# Altium PCB EBC2.PcbDoc
Units mil, origin at the board's own origin, x right, y up, seen from the top; angles counter-clockwise.
Board outline 2303.15 x 1181.1 mil, 2 copper layers (Top Layer, Bottom Layer), stack 12.8 mil thick; 135 components, 122 nets, 382 pads, 17 vias.
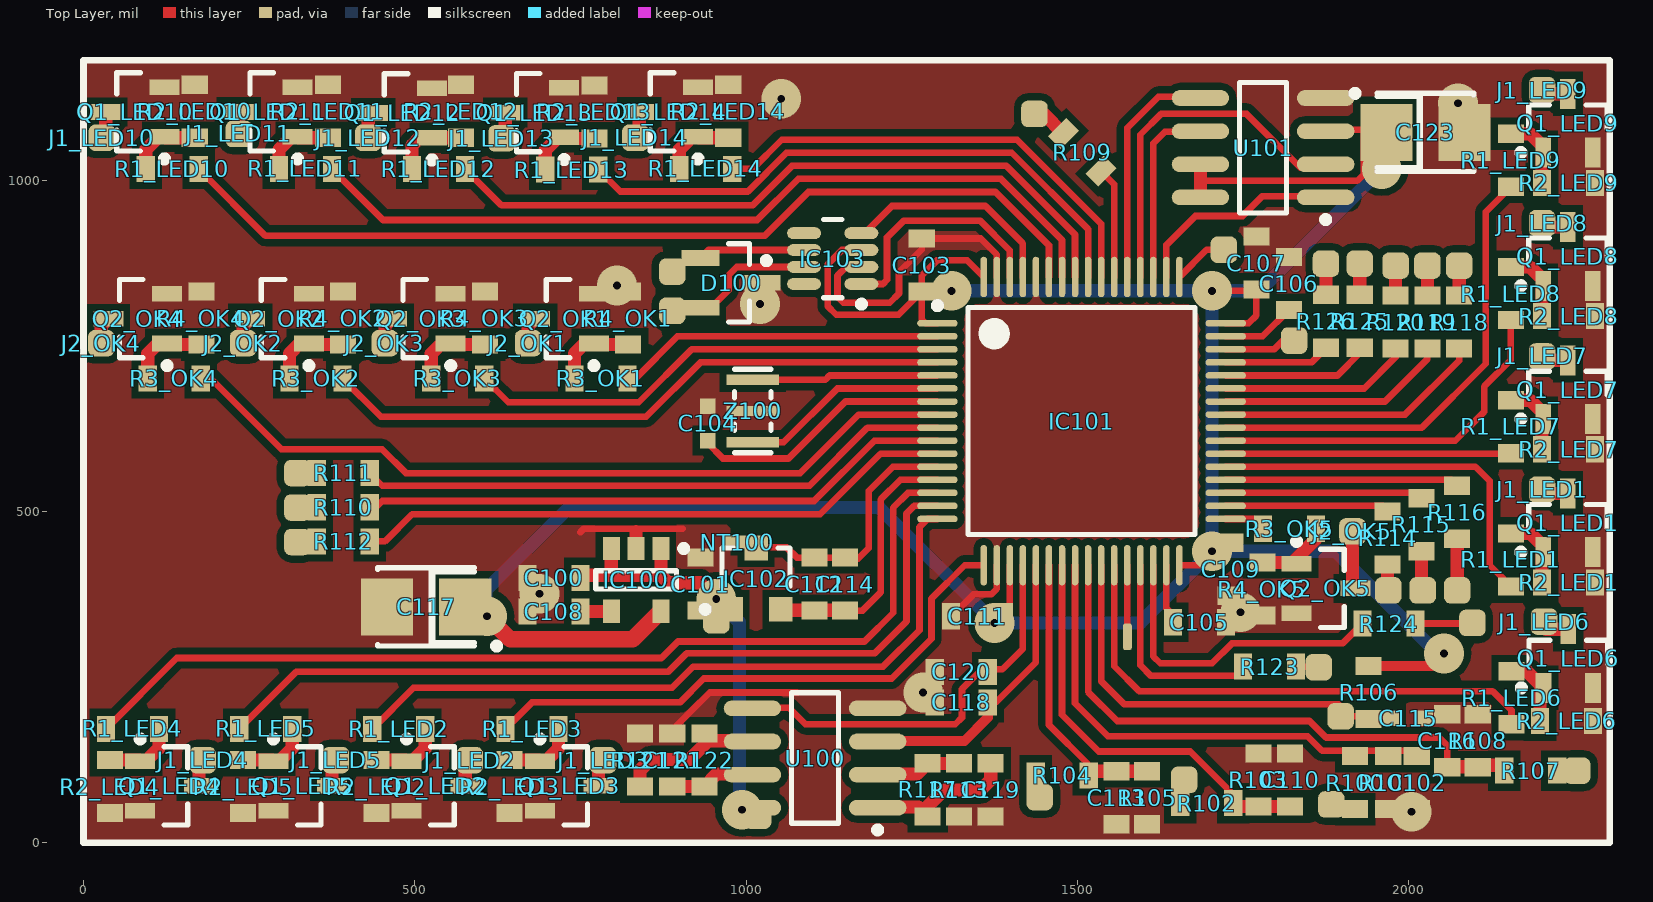
[diagram p0: Top Layer view]
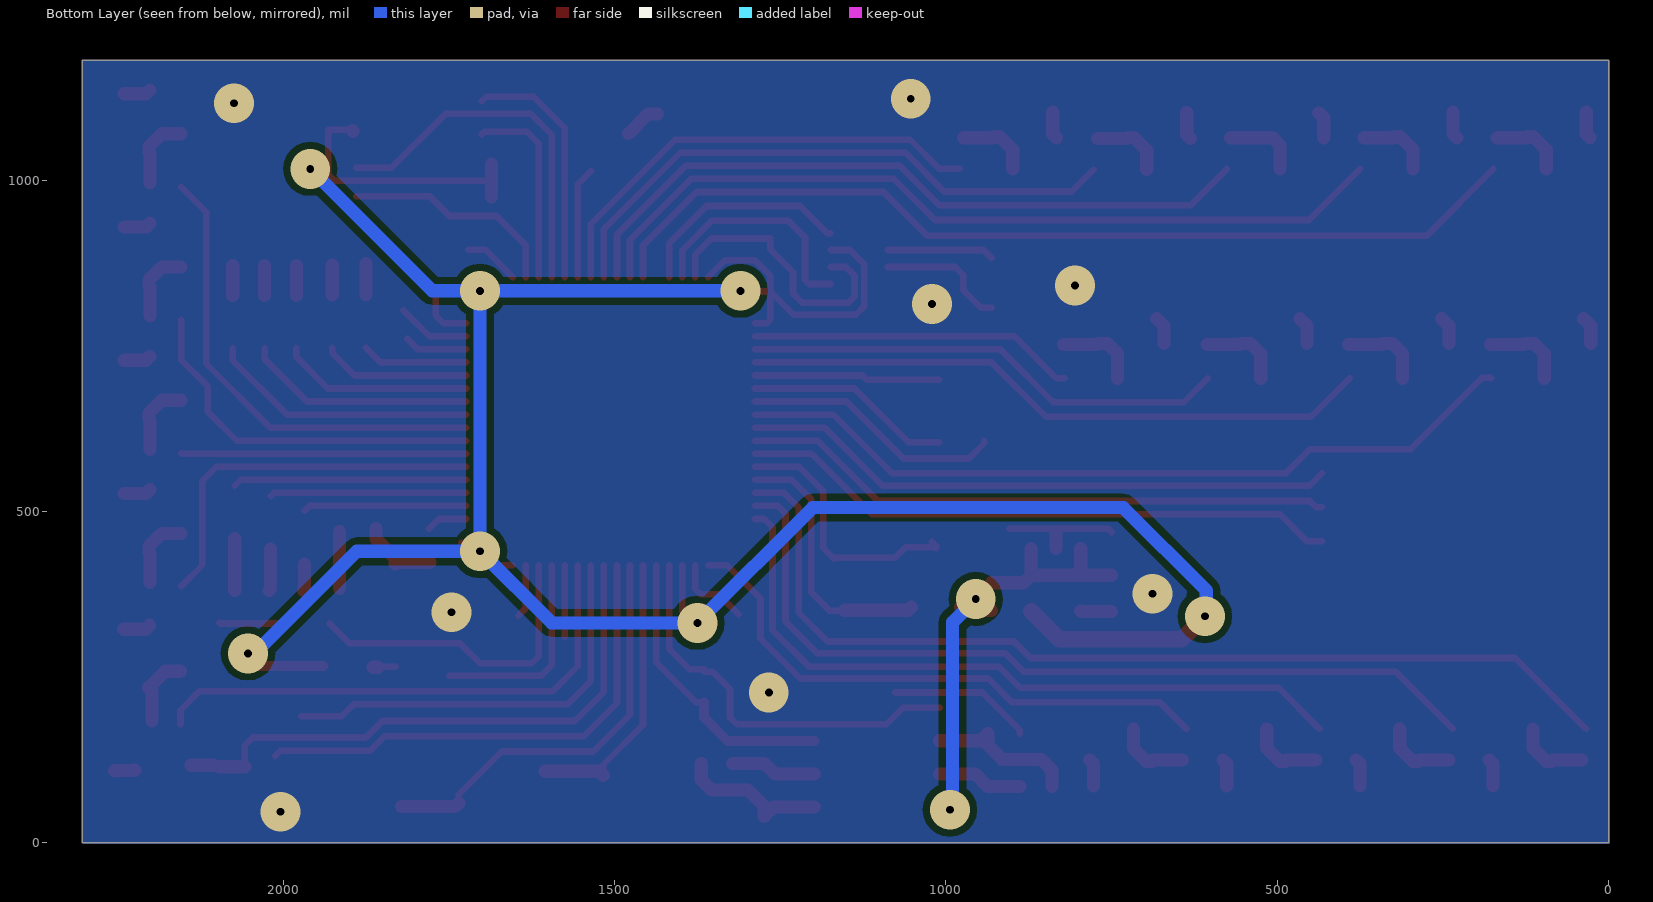
[diagram p1: Bottom Layer view, seen from below]

## Layer stack, top to bottom
Top Solder: solder mask 0.4, Solder Resist, Dk 3.5
Top Layer: signal copper 1.4
Dielectric1: core 10, FR-4, Dk 4.2
Bottom Layer: signal copper 1.4
Bottom Solder: solder mask 0.4, Solder Resist, Dk 3.5

## Board outline
0,0 0,1181.1 2303.15,1181.1 2303.15,0

## Design rules (kind name [scope] priority, off if disabled: settings)
AssemblyTestPointUsage [All] p1 off:
AssemblyTestpoint [All] p1 off: testpointundercomponent=TRUE minsize=40 maxsize=100 preferedsize=60 minholesize=0 maxholesize=40 preferedholesize=32 testpointgrid=1 usegrid=TRUE gridtolerance=0.01 allowsidetop=TRUE allowsidebottom=TRUE
Clearance Clearance_Phases [InPolygon and InNetClass('Phases')] p1: gap=5 ignorepadtopadclearanceinfootprint=FALSE except(0: Arc-Hole Track-Hole SMDPad-Hole THPad-Hole Via-Hole Fill-Hole Poly-Hole Region-Hole Text-Hole; 7: Arc-Poly Track-Poly SMDPad-Poly THPad-Poly Via-Poly Fill-Poly Poly-Poly)
Clearance "Clearance pads mounting" [(InNet('HOUSING_0') OR InNet('HOUSING_1') OR InNet('HOUSING_2')) AND IsPad] p2: gap=0.1 ignorepadtopadclearanceinfootprint=FALSE except(0: Arc-Hole Track-Hole SMDPad-Hole THPad-Hole Via-Hole Fill-Hole Poly-Hole Region-Hole Text-Hole)
Clearance "Clearance main" [All] p3: gap=10.5 ignorepadtopadclearanceinfootprint=FALSE except(0: Arc-Hole Track-Hole SMDPad-Hole THPad-Hole Via-Hole Fill-Hole Poly-Hole Region-Hole Text-Hole; 6.5: SMDPad-SMDPad; 7: Arc-SMDPad Arc-Via Arc-Text Track-SMDPad Track-Via Track-Text SMDPad-Text THPad-Text Via-Text Fill-Text Poly-Text Region-Text Text-Text; 8: Arc-Arc Arc-Track Arc-THPad Track-Track Track-THPad SMDPad-THPad THPad-THPad; 8.5: SMDPad-Via THPad-Via Via-Via)
ComponentClearance [All] p1 off: gap=10 collisioncheckmode=3 verticalgap=10 showdistances=FALSE
DiffPairsRouting [All] p1: maxlimit=10 minlimit=5 mostfreqgap=5 toplayer_minwidth=6 toplayer_maxwidth=25 toplayer_prefwidth=8 bottomlayer_minwidth=6 bottomlayer_maxwidth=25 bottomlayer_prefwidth=8 maxuncoupledlength=500
FabricationTestPointUsage [All] p1 off: valid=0 allowmultiple=FALSE
FabricationTestpoint [(IsPad And (OnTopLayer Or OnBottomLayer))] p1 off: side=3 testpointundercomponent=TRUE minsize=40 maxsize=100 preferedsize=60 minholesize=0 maxholesize=40 preferedholesize=32 testpointgrid=1 allowsidetop=TRUE allowsidebottom=TRUE usegrid=TRUE gridtolerance=0.01
HoleSize [All] p1: absolutevalues=TRUE maxlimit=200 minlimit=1 maxpercent=80.000 minpercent=20.000
HoleToHoleClearance [All] p1: gap=5.12 allowstackedmicrovias=TRUE
MinimumSolderMaskSliver [All] p1 off: minsoldermaskwidth=1.97
NetAntennae [All] p1 off: netantennaetolerance=10
PasteMaskExpansion [All] p1 off: expansion=0
PlaneClearance [All] p1: clearance=10
PlaneConnect [All] p1: planeconnectstyle=Direct reliefexpansion=7.87 reliefentries=4 reliefconductorwidth=0 reliefairgap=7.87
PolygonConnect [All] p1: connectstyle=Direct reliefconductorwidth=11.81 reliefentries=4 polygonreliefangle="90 Angle" airgapwidth=11.81
RoomDefinition LED6 [InComponentClass('LED6')] p1: confinementstyle=ConfineIn formatcopy=TRUE lockcomponents=FALSE outline 2311.84,157 2311.84,359 2126.84,359 2126.84,157
RoomDefinition LED10 [InComponentClass('LED10')] p2: confinementstyle=ConfineIn formatcopy=TRUE lockcomponents=FALSE outline -1.16,992 199.84,992 199.84,1175 -1.16,1175
RoomDefinition LED7 [InComponentClass('LED7')] p3: confinementstyle=ConfineIn formatcopy=TRUE lockcomponents=FALSE outline 2128.84,763 2128.84,562 2311.84,562 2311.84,763
RoomDefinition LED3 [InComponentClass('LED3')] p4: confinementstyle=ConfineIn formatcopy=TRUE lockcomponents=FALSE outline 811.84,197 610.84,197 610.84,14 811.84,14
RoomDefinition LED14 [InComponentClass('LED14')] p5: confinementstyle=ConfineIn formatcopy=TRUE lockcomponents=FALSE outline 803.84,992 1004.84,992 1004.84,1175 803.84,1175
RoomDefinition LED13 [InComponentClass('LED13')] p6: confinementstyle=ConfineIn formatcopy=TRUE lockcomponents=FALSE outline 601.84,991 802.84,991 802.84,1174 601.84,1174
RoomDefinition LED12 [InComponentClass('LED12')] p7: confinementstyle=ConfineIn formatcopy=TRUE lockcomponents=FALSE outline 400.84,992 601.84,992 601.84,1175 400.84,1175
RoomDefinition LED11 [InComponentClass('LED11')] p8: confinementstyle=ConfineIn formatcopy=TRUE lockcomponents=FALSE outline 199.84,992 400.84,992 400.84,1175 199.84,1175
RoomDefinition LED9 [InComponentClass('LED9')] p9: confinementstyle=ConfineIn formatcopy=TRUE lockcomponents=FALSE outline 2128.84,1165 2128.84,964 2311.84,964 2311.84,1165
RoomDefinition LED8 [InComponentClass('LED8')] p10: confinementstyle=ConfineIn formatcopy=TRUE lockcomponents=FALSE outline 2128.84,964 2128.84,763 2311.84,763 2311.84,964
RoomDefinition LED5 [InComponentClass('LED5')] p11: confinementstyle=ConfineIn formatcopy=TRUE lockcomponents=FALSE outline 409.84,197 208.84,197 208.84,14 409.84,14
RoomDefinition LED4 [InComponentClass('LED4')] p12: confinementstyle=ConfineIn formatcopy=TRUE lockcomponents=FALSE outline 208.84,197 7.84,197 7.84,14 208.84,14
RoomDefinition OK3 [InComponentClass('OK3')] p13: confinementstyle=ConfineIn formatcopy=TRUE lockcomponents=FALSE outline 640.84,862 426.84,862 426.84,675 640.84,675
RoomDefinition OK2 [InComponentClass('OK2')] p14: confinementstyle=ConfineIn formatcopy=TRUE lockcomponents=FALSE outline 426.84,862 212.84,862 212.84,675 426.84,675
RoomDefinition LED2 [InComponentClass('LED2')] p15: confinementstyle=ConfineIn formatcopy=TRUE lockcomponents=FALSE outline 610.84,197 409.84,197 409.84,14 610.84,14
RoomDefinition LED1 [InComponentClass('LED1')] p16: confinementstyle=ConfineIn formatcopy=TRUE lockcomponents=FALSE outline 2128.84,562 2128.84,361 2311.84,361 2311.84,562
RoomDefinition OK5 [InComponentClass('OK5')] p17: confinementstyle=ConfineIn formatcopy=TRUE lockcomponents=FALSE outline 1743.84,313 1957.84,313 1957.84,500 1743.84,500
RoomDefinition OK4 [InComponentClass('OK4')] p18: confinementstyle=ConfineIn formatcopy=TRUE lockcomponents=FALSE outline 212.84,862 -1.16,862 -1.16,675 212.84,675
RoomDefinition OK1 [InComponentClass('OK1')] p19: confinementstyle=ConfineIn formatcopy=TRUE lockcomponents=FALSE outline 856.84,862 642.84,862 642.84,675 856.84,675
RoutingVias [All] p1: holewidth=11.81 width=60 viastyle="Through Hole" minholewidth=5 minwidth=50 maxholewidth=180 maxwidth=180
SilkToSilkClearance [All] p1 off: silktosilkclearance=3.94
SilkToSolderMaskClearance SilkscreenOverComponentPads [IsPad] p1 off: minsilkscreentomaskgap=5.12 clearancetoexposedcopper=TRUE
SolderMaskExpansion [All] p1 off: expansion=7.87
Width [All] p1: maxlimit=236.22 minlimit=10 preferedwidth=10
15 further rules are at their usual default settings.

## Classes and differential pairs
component class Controller: C1 C2 C4 C5 C6 C7 C10 C11 C15 C17 C18 C19 C22 C23 C26 C100 C101 C102 C103 C104 C105 C106 C107 C108 C109 C110 C111 C112 C113 C114 C115 C116 C117 C118 C119 C120 C121 C123 D1 D100 H2.1 HL1 IC1 IC2 IC3 IC100 IC101 IC102 IC103 J107 NT100 P103 Q102 R5 R13 R14 R15 R16 R20 R21 R100 R101 R102 R103 R104 R105 R106 R107 R108 R109 R110 R111 R112 R113 R114 R115 R116 R117 R118 R119 R120 R121 R122 R123 R124 R125 R126 R? U1 U2 U100 U101 Y1 Z100
component class LED1: J1_LED1 Q1_LED1 R1_LED1 R2_LED1
component class LED2: J1_LED2 Q1_LED2 R1_LED2 R2_LED2
component class LED3: J1_LED3 Q1_LED3 R1_LED3 R2_LED3
component class LED4: J1_LED4 Q1_LED4 R1_LED4 R2_LED4
component class LED5: J1_LED5 Q1_LED5 R1_LED5 R2_LED5
component class LED14: J1_LED14 Q1_LED14 R1_LED14 R2_LED14
component class LED7: J1_LED7 Q1_LED7 R1_LED7 R2_LED7
component class LED8: J1_LED8 Q1_LED8 R1_LED8 R2_LED8
component class LED9: J1_LED9 Q1_LED9 R1_LED9 R2_LED9
component class LED10: J1_LED10 Q1_LED10 R1_LED10 R2_LED10
component class LED11: J1_LED11 Q1_LED11 R1_LED11 R2_LED11
component class LED12: J1_LED12 Q1_LED12 R1_LED12 R2_LED12
component class LED13: J1_LED13 Q1_LED13 R1_LED13 R2_LED13
channel class LED_DRV: LED1 LED2 LED3 LED4 LED5 LED7 LED8 LED9 LED10 LED11 LED12 LED13 LED14
component class OK5: J2_OK5 Q2_OK5 R3_OK5 R4_OK5
component class LED6: J1_LED6 Q1_LED6 R1_LED6 R2_LED6
component class OK1: J2_OK1 Q2_OK1 R3_OK1 R4_OK1
component class OK2: J2_OK2 Q2_OK2 R3_OK2 R4_OK2
component class OK3: J2_OK3 Q2_OK3 R3_OK3 R4_OK3
component class OK4: J2_OK4 Q2_OK4 R3_OK4 R4_OK4
channel class OK: OK1 OK2 OK3 OK4 OK5

## Components (designator, comment, footprint, x,y, rotation, side; value= is the part's Value field where it differs from the comment)
C100 "Cap" 0603x 709.84,400 r180 top value=100n
C101 "Cap" 0603x 930.84,390.56 r90 top value=100n
C102 "Cap" 0603x 2011.84,91 r270 top value=10n
C103 "Cap" 0603x 1264.84,872 r90 top value=100n
C104 "Cap" 0402x 941.84,633 r90 top value=100n
C105 "Cap" 0603x 1683.84,333 r0 top value=100n
C106 "Cap" 0603x 1818.84,844 r90 top value=100n
C107 "Cap" 0603x 1769.84,875 r90 top value=100n
C108 "Cap" 0603x 709.84,349 r180 top value=100n
C109 "Cap" 0603x 1730.84,413 r270 top value=100n
C110 "Cap" 0603x 1820.84,95 r90 top value=10n
C111 "Cap" 0603x 1348.84,342 r180 top value=100n
C112 "Cap" 0603x 1102.84,390.56 r90 top value=100n
C113 "Cap" 0603x 1558.84,68 r270 top value=10n
C114 "Cap" 0603x 1148.84,390.56 r90 top value=100n
C115 "Cap" 0402x 1998.84,188 r0 top value=10n
C116 "Cap" 0603x 2057.84,154 r90 top value=10n
C117 "Cap" RR_B 517,356 r180 top value=22U
C118 "Cap" 0603x 1324.52,212 r180 top value=100n
C119 "Cap" 0603x 1368.84,80 r270 top value=100n
C120 "Cap" 0603x 1324.52,258 r180 top value=100n
C121 "Cap" 0603x 888.34,125 r90 top value=100n
C123 "Cap" RR_B 2025,1072 r0 top value=22U
D100 "NUP2105LT1G" SOT23_M 977.25,845.14 r0 top
IC100 "TPS73233DBVT" SOT23-5_L 833.84,397 r270 top value="LDO 3.3V 250mA"
IC101 "STM32F405_1" LQFP64_L 1506.06,636.48 r0 top value=STM32F405RGT6
IC102 "LT1460KCS3-3.3" SOT-23 1014.84,398.74 r0 top value="Voltage reference 3.3V 0.5% 50ppm/C"
IC103 "TCAN332GDCNT" SOT23-8_L 1130.54,881.8 r180 top
J1_LED1 "Socket" PIN#001 2200.78,531.94 r90 top (schematic designator J1)
J1_LED2 "Socket" PIN#001 581.84,125 r0 top (schematic designator J1)
J1_LED3 "Socket" PIN#001 782.84,125 r0 top (schematic designator J1)
J1_LED4 "Socket" PIN#001 178.78,125.06 r0 top (schematic designator J1)
J1_LED5 "Socket" PIN#001 379.78,125.06 r0 top (schematic designator J1)
J1_LED6 "Socket" PIN#001 2203.78,332.94 r90 top (schematic designator J1)
J1_LED7 "Socket" PIN#001 2200.78,732.94 r90 top (schematic designator J1)
J1_LED8 "Socket" PIN#001 2200.78,933.94 r90 top (schematic designator J1)
J1_LED9 "Socket" PIN#001 2200.78,1134.94 r90 top (schematic designator J1)
J1_LED10 "Socket" PIN#001 28.91,1063.94 r180 top (schematic designator J1)
J1_LED11 "Socket" PIN#001 235.61,1069.65 r180 top (schematic designator J1)
J1_LED12 "Socket" PIN#001 430.91,1063.94 r180 top (schematic designator J1)
J1_LED13 "Socket" PIN#001 631.91,1062.94 r180 top (schematic designator J1)
J1_LED14 "Socket" PIN#001 833.91,1063.94 r180 top (schematic designator J1)
J2_OK1 "Socket" PIN#001 671.91,753.94 r180 top (schematic designator J2)
J2_OK2 "Socket" PIN#001 241.91,753.94 r180 top (schematic designator J2)
J2_OK3 "Socket" PIN#001 455.91,753.94 r180 top (schematic designator J2)
J2_OK4 "Socket" PIN#001 27.91,753.94 r180 top (schematic designator J2)
J2_OK5 "Socket" PIN#001 1913.78,470.06 r0 top (schematic designator J2)
NT100 "NET_TIE" NET_TIE_20mil 996.68,454 r180 top net-tie
Q1_LED1 "IRLML2502" SOT-23_N 2239.84,483 r90 top (schematic designator Q1)
Q1_LED2 "IRLML2502" SOT-23_N 531.84,86 r0 top (schematic designator Q1)
Q1_LED3 "IRLML2502" SOT-23_N 732.84,86 r0 top (schematic designator Q1)
Q1_LED4 "IRLML2502" SOT-23_N 129.84,86 r0 top (schematic designator Q1)
Q1_LED5 "IRLML2502" SOT-23_N 330.84,86 r0 top (schematic designator Q1)
Q1_LED6 "IRLML2502" SOT-23_N 2240.44,278.29 r90 top (schematic designator Q1)
Q1_LED7 "IRLML2502" SOT-23_N 2239.84,684 r90 top (schematic designator Q1)
Q1_LED8 "IRLML2502" SOT-23_N 2239.84,885 r90 top (schematic designator Q1)
Q1_LED9 "IRLML2502" SOT-23_N 2239.84,1086 r90 top (schematic designator Q1)
Q1_LED10 "IRLML2502" SOT-23_N 77.84,1103 r180 top (schematic designator Q1)
Q1_LED11 "IRLML2502" SOT-23_N 278.84,1103 r180 top (schematic designator Q1)
Q1_LED12 "IRLML2502" SOT-23_N 481.44,1101.4 r180 top (schematic designator Q1)
Q1_LED13 "IRLML2502" SOT-23_N 680.84,1102 r180 top (schematic designator Q1)
Q1_LED14 "IRLML2502" SOT-23_N 882.84,1103 r180 top (schematic designator Q1)
Q2_OK1 "2N7002" SOT-23_N 725.84,791 r180 top (schematic designator Q2)
Q2_OK2 "2N7002" SOT-23_N 295.84,791 r180 top (schematic designator Q2)
Q2_OK3 "2N7002" SOT-23_N 509.84,791 r180 top (schematic designator Q2)
Q2_OK4 "2N7002" SOT-23_N 81.84,791 r180 top (schematic designator Q2)
Q2_OK5 "2N7002" SOT-23_N 1874.84,384 r0 top (schematic designator Q2)
R1_LED1 "" 0603x 2153.84,427 r270 top value=100 (schematic designator R1)
R1_LED2 "" 0603x 475.84,172 r180 top value=100 (schematic designator R1)
R1_LED3 "" 0603x 676.84,172 r180 top value=100 (schematic designator R1)
R1_LED4 "" 0603x 73.84,172 r180 top value=100 (schematic designator R1)
R1_LED5 "" 0603x 274.84,172 r180 top value=100 (schematic designator R1)
R1_LED6 "" 0603x 2154.84,219 r270 top value=100 (schematic designator R1)
R1_LED7 "" 0603x 2153.84,628 r270 top value=100 (schematic designator R1)
R1_LED8 "" 0603x 2153.84,829 r270 top value=100 (schematic designator R1)
R1_LED9 "" 0603x 2153.84,1030 r270 top value=100 (schematic designator R1)
R1_LED10 "" 0603x 133.84,1017 r0 top value=100 (schematic designator R1)
R1_LED11 "" 0603x 334.84,1017 r0 top value=100 (schematic designator R1)
R1_LED12 "" 0603x 535.84,1017 r0 top value=100 (schematic designator R1)
R1_LED13 "" 0603x 736.84,1016 r0 top value=100 (schematic designator R1)
R1_LED14 "" 0603x 938.84,1017 r0 top value=100 (schematic designator R1)
R2_LED1 "" 0603x 2240.84,393 r180 top value=47K (schematic designator R2)
R2_LED2 "" 0603x 441.84,85 r90 top value=47K (schematic designator R2)
R2_LED3 "" 0603x 642.84,85 r90 top value=47K (schematic designator R2)
R2_LED4 "" 0603x 39.84,85 r90 top value=47K (schematic designator R2)
R2_LED5 "" 0603x 240.84,85 r90 top value=47K (schematic designator R2)
R2_LED6 "" 0603x 2237.84,184 r180 top value=47K (schematic designator R2)
R2_LED7 "" 0603x 2240.84,594 r180 top value=47K (schematic designator R2)
R2_LED8 "" 0603x 2240.84,795 r180 top value=47K (schematic designator R2)
R2_LED9 "" 0603x 2240.84,996 r180 top value=47K (schematic designator R2)
R2_LED10 "" 0603x 167.84,1104 r270 top value=47K (schematic designator R2)
R2_LED11 "" 0603x 368.84,1104 r270 top value=47K (schematic designator R2)
R2_LED12 "" 0603x 569.84,1104 r270 top value=47K (schematic designator R2)
R2_LED13 "" 0603x 770.84,1103 r270 top value=47K (schematic designator R2)
R2_LED14 "" 0603x 972.84,1104 r270 top value=47K (schematic designator R2)
R3_OK1 "" 0603x 780.84,701 r0 top value=100 (schematic designator R3)
R3_OK2 "" 0603x 350.84,701 r0 top value=100 (schematic designator R3)
R3_OK3 "" 0603x 564.84,701 r0 top value=100 (schematic designator R3)
R3_OK4 "" 0603x 136.84,701 r0 top value=100 (schematic designator R3)
R3_OK5 "" 0603x 1819.84,474 r180 top value=100 (schematic designator R3)
R4_OK1 "" 0603x 821.84,792 r270 top value=47K (schematic designator R4)
R4_OK2 "" 0603x 391.84,792 r270 top value=47K (schematic designator R4)
R4_OK3 "" 0603x 605.84,792 r270 top value=47K (schematic designator R4)
R4_OK4 "" 0603x 177.84,792 r270 top value=47K (schematic designator R4)
R4_OK5 "" 0603x 1778.84,383 r90 top value=47K (schematic designator R4)
R100 "Res1" 0603x 1918.84,91 r90 top value=1K
R101 "Res1" 0603x 1968.84,91 r270 top value=1K
R102 "Res1" 0603x 1694.84,60 r0 top value=1K
R103 "Res1" 0603x 1772.84,95 r90 top value=1K
R104 "Res1" 0603x 1476.84,102 r0 top value=1K
R105 "Res1" 0603x 1604.84,68 r270 top value=1K
R106 "Res1" 0603x 1939,227 r270 top value=1K
R107 "Res1" 0603x 2183.84,109 r180 top value=1K
R108 "Res1" 0603x 2103.84,154 r90 top value=1K
R109 "Res1" 0603x 1507,1042 r135 top value=1K
R110 "Res1" 0603x 391.84,506.5 r0 top value=1K
R111 "Res1" 0603x 391.84,558 r0 top value=1K
R112 "Res1" 0603x 391.84,455 r0 top value=1K
R113 "Res1" 0603x 1321.34,80 r90 top value=1K
R114 "Res1" 0603x 1967.84,460 r90 top value=1K
R115 "Res1" 0603x 2018.84,480 r90 top value=1K
R116 "Res1" 0603x 2072.84,499 r90 top value=1K
R117 "Res1" 0603x 1273.84,80 r270 top value=1K
R118 "Res1" 0603x 2075.84,786 r270 top value=1K
R119 "Res1" 0603x 2027.84,786 r270 top value=1K
R120 "Res1" 0603x 1979.84,786 r270 top value=1K
R121 "Res1" 0603x 839.84,125 r270 top value=1K
R122 "Res1" 0603x 936.84,125 r270 top value=1K
R123 "Res1" 0603x 1789.75,266 r0 top value=1K
R124 "Res1" 0603x 1969.84,331 r0 top value=1K
R125 "Res1" 0603x 1925.84,787 r270 top value=1K
R126 "Res1" 0603x 1874.84,787 r270 top value=1K
U100 "MCP602-E/SN" SOIC-SN8_N 1103.84,128 r180 top
U101 "25AA010A-I/MS" SO-8_N 1779.84,1049 r180 top
Z100 "AWSCR-8.00CV-T" CRYSTAL_3.2X1.3 1009.84,651.76 r90 top value="CER RES 8.0000MHZ 22PF SMD"

## Footprints (in the part's own frame and the unit in brackets; to place one, negate y for a bottom-side part, rotate by r counter-clockwise, add the part's x,y. Pads: shape width x height; smd on the part's side, far side on the other; paste and mask are expansions set on the pad)
0402x [mm] "Chip Capacitor, Body 1.0x0.5mm, IPC Medium Density"
  rect 0.6x0.6 smd: 1(-0.66,0) 2(0.66,0)
  body extent -0.5,-0.25 0.5,0.25, height 0.6
0603x [mm] "Chip Resistor; Body 1.6 x 0.8 mm (LxW typ)"
  rect 0.7x1 smd: 1(-1.016,0) 2(1.016,0)
CRYSTAL_3.2X1.3 [mm]
  rect 0.4x2 smd: 1(1.2,0) 2(0,0) 3(-1.2,0)
  silkscreen extent -1.6,-0.7 1.6,0.7, body extent -1.6,-0.7 1.6,0.7, height 0.9
LQFP64_L [mm] "Thin QFP, 64-Leads, Body 10x10mm, Pitch 0.5mm, IPC High Density"
  oval 1.55x0.25 smd: 1(-5.525,3.75) 2(-5.525,3.25) 3(-5.525,2.75) 4(-5.525,2.25) 5(-5.525,1.75) 6(-5.525,1.25) 7(-5.525,0.75) 8(-5.525,0.25) 9(-5.525,-0.25) 10(-5.525,-0.75) 11(-5.525,-1.25) 12(-5.525,-1.75) 13(-5.525,-2.25) 14(-5.525,-2.75) 15(-5.525,-3.25) 16(-5.525,-3.75) 33(5.525,-3.75) 34(5.525,-3.25) 35(5.525,-2.75) 36(5.525,-2.25) 37(5.525,-1.75) 38(5.525,-1.25) 39(5.525,-0.75) 40(5.525,-0.25) 41(5.525,0.25) 42(5.525,0.75) 43(5.525,1.25) 44(5.525,1.75) 45(5.525,2.25) 46(5.525,2.75) 47(5.525,3.25) 48(5.525,3.75)
  oval 0.25x1.55 smd: 17(-3.75,-5.525) 18(-3.25,-5.525) 19(-2.75,-5.525) 20(-2.25,-5.525) 21(-1.75,-5.525) 22(-1.25,-5.525) 23(-0.75,-5.525) 24(-0.25,-5.525) 25(0.25,-5.525) 26(0.75,-5.525) 27(1.25,-5.525) 28(1.75,-5.525) 29(2.25,-5.525) 30(2.75,-5.525) 31(3.25,-5.525) 32(3.75,-5.525) 49(3.75,5.525) 50(3.25,5.525) 51(2.75,5.525) 52(2.25,5.525) 53(1.75,5.525) 54(1.25,5.525) 55(0.75,5.525) 56(0.25,5.525) 57(-0.25,5.525) 58(-0.75,5.525) 59(-1.25,5.525) 60(-1.75,5.525) 61(-2.25,5.525) 62(-2.75,5.525) 63(-3.25,5.525) 64(-3.75,5.525)
  silkscreen extent -5.65,-4.35 4.35,4.55, body extent -5,-5 5,5, height 1.6
NET_TIE_20mil [mil] "Net tie"
  rect 20x20 smd paste+0 mask+0: 1(19.68,0) 2(0,0)
PIN#001 [mil]
  rrect50% 40x40 smd: 1(1.06,-0.06)
RR_B [mm] "Capacitor, SM Tantalum; Body 3.5 x 2.8 mm (LxW typ)"
  rect 2x2.2 smd: 1(-1.5,0) 2(1.5,0)
  silkscreen extent -2.83,-1.5 1.85,1.62, body extent -1.5,-1.5 1.5,1.5, height 2.1
SO-8_N [mm] "SOIC, 8-Leads, Body 4.9x3.9mm, Pitch 1.27mm, IPC Medium Density"
  oval 2.2x0.6 smd: 1(-2.4,1.905) 2(-2.4,0.635) 3(-2.4,-0.635) 4(-2.4,-1.905) 5(2.4,-1.905) 6(2.4,-0.635) 7(2.4,0.635) 8(2.4,1.905)
  silkscreen extent -2.53,-2.5 0.9,2.88, body extent -2,-2.5 2,2.5, height 1.75
SOIC-SN8_N [mm] "SOIC, 8-Leads, Body 4.9x3.8mm, Pitch 1.27mm, IPC Medium Density"
  oval 2.2x0.6 smd: 1(-2.4,1.905) 2(-2.4,0.635) 3(-2.4,-0.635) 4(-2.4,-1.905) 5(2.4,-1.905) 6(2.4,-0.635) 7(2.4,0.635) 8(2.4,1.905)
  silkscreen extent -2.53,-2.5 0.9,2.88, body extent -2,-2.5 2,2.5, height 1.75
SOT23-5_L [mm] "SOT23, 5-Leads, Body 2.9x1.6mm, Pitch 0.95mm, Lead Span 2.8mm, IPC High Density"
  rect 0.9x0.65 smd: 1(-1.2,0.95) 2(-1.2,0) 3(-1.2,-0.95) 4(1.2,-0.95) 5(1.2,0.95)
  silkscreen extent -1.32,-1.55 0.35,1.95, body extent -0.9,-1.55 0.9,1.55, height 1.45
SOT23-8_L [mm] "SOP, 8-Leads, Body 2.9x1.6mm, Pitch 0.65mm, IPC High Density"
  oval 1.3x0.45 smd: 1(-1.1,0.975) 2(-1.1,0.325) 3(-1.1,-0.325) 4(-1.1,-0.975) 5(1.1,-0.975) 6(1.1,-0.325) 7(1.1,0.325) 8(1.1,0.975)
  silkscreen extent -1.22,-1.5 0.35,1.87, body extent -0.88,-1.5 0.88,1.5, height 1.45
SOT23_M [mm] "SOT23, 3-Leads, Body 2.9x1.3mm, Pitch 0.95mm, Lead Span 2.3mm - Reverse Pinning, IPC Low Density"
  rect 1.45x0.6 smd: 1(1.175,0) 2(-1.175,-0.95) 3(-1.175,0.95)
  silkscreen extent -0.1,-1.5 1.48,1.5, body extent -0.7,-1.5 0.7,1.5, height 1.1
SOT-23 [mm] "SOT-23; 3 Leads; Body 3.1 x 2.5 mm, inc. leads (LxW max)"
  rect 0.9x0.95 smd: 1(-0.95,-1.175) 2(0.95,-1.175) 3(0,1.175)
  silkscreen extent -2.07,-1.3 1.3,1.18
SOT-23_N [mm] "SOT23, 3-Leads, Body 2.9x1.3mm, Pitch 0.95mm, Lead Span 2.3mm, IPC Medium Density"
  rect 1.15x0.6 smd: 1(-1.125,0.95) 2(-1.125,-0.95) 3(1.125,0)
  silkscreen extent -1.25,-1.5 0.7,1.92, body extent -0.7,-1.5 0.7,1.5, height 1.11

## Part data
C100 C101 C102 C103 C104 C105 C106 C107 C108 C109 C110 C111 C112 C113 C114 C115 C116 C117 C118 C119 C120 C121 C123: "Capacitor", LatestRevisionDate=17-Jul-2002, LatestRevisionNote="Re-released for DXP Platform.", PackageDescription="Radial Cap, Thru-Hole; 2 Leads; 0.3 in Pin Spacing", PackageReference=RAD-0.3, Published=8-Jun-2000, Publisher="Altium Limited"
D100: library part BAT54A, "Schottky Barrier Double Diode", Package=SOT23, ComponentLink1Description="Manufacturer Link", ComponentLink1URL=http://www.semiconductors.philips.com/, Distributor="ON Semiconductor", LatestRevisionNote="IPC-7351 Footprint Added.", Order Number=NUP2105LT1G, PackageDescription="3-Pin SOT-23 Package 0.95 mm Pitch, 2.3 mm Lead Span"
IC100: library part TPS7xx33, Package=SOT23-5, Distributor="Texas Instruments", Order Number=TPS73233DBVT
IC101: "STM32 ARM-based 32-bit MCU", Package=LQFP-64, Distributor=STMicroelectronics, Order Number=STM32F405RGT6
IC102: library part PreciseRef, Package=SOT23, Distributor="Linear Technology", Order Number=LT1460KCS3-3.3#TRMPBF
IC103: Package=SOT23-8, Distributor="Texas Instruments", Order Number=TCAN332GDCNT
NT100: library part "Net tie", "Net tie"
Q1_LED1 Q1_LED2 Q1_LED3 Q1_LED4 Q1_LED5 Q1_LED6 Q1_LED7 Q1_LED8 Q1_LED9 Q1_LED10 Q1_LED11 Q1_LED12 Q1_LED13 Q1_LED14 Q2_OK1 Q2_OK2 Q2_OK3 Q2_OK4 Q2_OK5: library part IRLML2402, "HEXFET Power MOSFET", ComponentLink1Description="Manufacturer Link", ComponentLink1URL=http://www.irf.com/, ComponentLink2Description=Datasheet, ComponentLink2URL=http://www.irf.com/product-info/datasheets/data/irlml2402.pdf, DatasheetVersion=Aug-1997, LatestRevisionDate=20-Nov-2009, LatestRevisionNote="IPC-7351 Footprint Added.", PackageDescription="3-Pin SOT-23 Package 0.95 mm Pitch, 2.3 mm Lead Span", PackageReference=SOT-23, Published=8-Jun-2000, Publisher="Altium Limited"
R1_LED1 R1_LED2 R1_LED3 R1_LED4 R1_LED5 R1_LED6 R1_LED7 R1_LED8 R1_LED9 R1_LED10 R1_LED11 R1_LED12 R1_LED13 R1_LED14 R2_LED1 R2_LED2 R2_LED3 R2_LED4 R2_LED5 R2_LED6 R2_LED7 R2_LED8 R2_LED9 R2_LED10 R2_LED11 R2_LED12 R2_LED13 R2_LED14 R3_OK1 R3_OK2 R3_OK3 R3_OK4 R3_OK5 R4_OK1 R4_OK2 R4_OK3 R4_OK4 R4_OK5: library part Res1, "Resistor", LatestRevisionDate=17-Jul-2002, LatestRevisionNote="Re-released for DXP Platform.", PackageDescription="Axial Device, Thru-Hole; 2 Leads; 0.3 in Pin Spacing", PackageReference=AXIAL-0.3, Published=8-Jun-2000, Publisher="Altium Limited"
R100 R101 R102 R103 R104 R105 R106 R107 R108 R109 R110 R111 R112 R113 R114 R115 R116 R117 R118 R119 R120 R121 R122 R123 R124 R125 R126: "Resistor", LatestRevisionDate=17-Jul-2002, LatestRevisionNote="Re-released for DXP Platform.", PackageDescription="Axial Device, Thru-Hole; 2 Leads; 0.3 in Pin Spacing", PackageReference=AXIAL-0.3, Published=8-Jun-2000, Publisher="Altium Limited"
U100: "2.7V to 6.0V Single Supply CMOS Operational Amplifier, 8-Pin SOIC, Extended Temperature", Supplier Part Number 1=MCP602-E/SN-ND, Code_IPC=SOIC127P600-8, Code_JEDEC=MS-012, ComponentLink1Description=Datasheet, ComponentLink1URL=http://ww1.microchip.com/downloads/en/DeviceDoc/21314g.pdf, ComponentLink2Description="Packaging Specification", ComponentLink2URL=http://www.microchip.com/stellent/groups/techpub_sg/documents/packagingspec/en012702.pdf, ComponentLink3Description="Microchip.com Home", ComponentLink3URL=http://www.microchip.com/, DatasheetVersion="revG, Dec-2007", PackageDescription="8-Lead Plastic Small Outline (SN) - Narrow, 3.90mm Body [SOIC]", PackageReference=SOIC-SN8, PackageVersion="revBB, Aug-2009", Published=29-Jan-2009, Publisher="Altium Limited", Supplier 1=Digi-Key
U101: "1K SPI Bus Serial EEPROM, 8-Pin MSOP, Industrial Temperature", Supplier Part Number 1=25AA010A-I/MS-ND, ComponentLink1Description=Datasheet, ComponentLink1URL=http://ww1.microchip.com/downloads/en/DeviceDoc/21832E.pdf, ComponentLink2Description="Packaging Specification", ComponentLink2URL=http://www.microchip.com/stellent/groups/techpub_sg/documents/packagingspec/en012702.pdf, ComponentLink3Description="Microchip.com Home", ComponentLink3URL=http://www.microchip.com/, DatasheetVersion="revE, Sep-2008", LatestRevisionDate=02-Dec-2009, LatestRevisionNote="Updated to datasheet revision E, Jan-2008", PackageDescription="8-Lead Plastic Micro Small Outline Package (MS) [MSOP]", PackageReference=MSOP-MS8, PackageVersion="revBB, Aug-2009", Published=29-Jan-2009, Publisher="Altium Limited", Supplier 1=Digi-Key, Supplier 2=Farnell, Supplier Part Number 2=1331337
Z100: library part Crystal_smd_with_caps, Package="3-SMD, Non-Standard", Distributor="Abracon LLC", Order Number=AWSCR-8.00CV-T
J1_LED1 J1_LED2 J1_LED3 J1_LED4 J1_LED5 J1_LED6 J1_LED7 J1_LED8 J1_LED9 J1_LED10 J1_LED11 J1_LED12 J1_LED13 J1_LED14 J2_OK1 J2_OK2 J2_OK3 J2_OK4 J2_OK5: LatestRevisionDate=17-Jul-2002, LatestRevisionNote="Re-released for DXP Platform.", Publisher="Altium Limited"

## Free pads (board coordinates)
  rrect50% 40x40 smd: 2(1435,1100) 2(1720.84,895) 3(322.84,454) 3(322.84,506) 3(322.84,558) 3(888.52,803) 3(888.52,862) 3(955,336) 3(1018,41) 3(1442.84,69) 3(1660.84,95) 3(1826.84,758) 3(1864,265) 3(1874.84,874) 3(1882.84,58) 3(1897,191) 3(1925.84,874) 3(1968.84,381) 3(1979.84,871) 3(2020.84,381) 3(2027.84,871) 3(2072.84,381) 3(2075.84,871) 3(2095.84,332) 3(2253.84,109)
  rrect50% 13x40 smd: 3(1575.27,311)

## Via types
v1: diameter 60, hole 11.81, Top Layer to Bottom Layer, 17 vias

## Nets (pads, with @x,y where several pads share a name; then routed paths per layer and width w, separated by ;. In a path a pad name is that pad's centre, name@x,y a point inside that pad or via, vN(x,y) a via of type N, cw(c..) or ccw(c..) an arc to the next point about the centre after c; other vN are vias at no path point)
3.3V: C103.1 C107.1 C109.1 C111.1 C117.1 C123.1 IC100.5 IC101.1 IC101.19 IC101.32 IC101.48 IC101.64 IC103.3 R106.1 U101.3 U101.7 U101.8 | length 4521.1
  Top Layer w10: IC103.3 1144.43,894.59 1122.84,873 1122.84,810 1135.84,797 1229.84,797 C103.1 ; IC101.1 1270.72,784.12 1264.84,790 C103.1 ; v1(1309.84,833) 1308.84,832 C103.1 ; IC101.64 1333.42,879 1287.84,879 1264.84,856 C103.1 ; C111.1@1397.79,349.94 IC101.19 ; IC101.32 1696.8,418.96 C109.1 ; 1690,999 1922,999 1932,1009 1932,1076 U101.3@1889.33,1076 ; v1(1702.84,833) C107.1@1769.84,833 ; IC101.48 1757.96,784.12 1769.84,796 C107.1@1769.84,833 ; C107.1 C107.1@1769.84,833
  Top Layer w15: R106.1 2034,267 v1(2053,286)
  Top Layer w20: U101.8@1685.35,975 U101.7 ; U101.3@1894.33,1074 U101.3@1895.33,1075
  Top Layer w25: v1(609,342) 644,307 828.49,307 IC100.5
  Bottom Layer w20: v1(609,342) 607,340 607,381 732,506 1200.84,506 v1(1374.84,332) 1594.84,332 v1(1702.84,440) ; v1(1309.84,833) v1(1702.84,833) ; v1(1959,1017) 1775,833 v1(1702.84,833) ; v1@2049,286 2049,279.84 1888.84,440 v1(1702.84,440) ; v1(1702.84,440) v1(1702.84,833)
5V: C100.1 C101.1 IC100.1 IC100.3 IC102.1 pad.3@955,336 pad.3@1018,41 U100.8 | length 658.4
  Top Layer w20: C100.1@749.84,404 796.44,404 ; IC100.3 796.44,404 ; IC100.1 871.24,404 ; C101.1 972.52,350.56 IC102.1@977.44,355.48 ; 930.84,392.56 882.69,392.56 871.24,404 ; 796.44,404 871.24,404
  Bottom Layer w20: v1(954.84,368) 989.84,333 v1@989.84,39
  other v1: 993.84,50
48V: pad.3@1882.84,58 R100.1
\S\P\I\_\C\S: IC101.50 U101.1 | length 334.1
  Top Layer w10: IC101.50 1634.01,902.17 1677.84,946 1749,946 1779,976 U101.1@1889.33,976
_BRAKE: IC101.33 R3_OK5.2 | length 62.4
  Top Layer w10: IC101.33 1765,488.84 R3_OK5.2
_CRUISE: IC101.4 R3_OK2.2 | length 955.7
  Top Layer w10: R3_OK2.2 448.84,643 848.84,643 930.91,725.06 IC101.4
_HALL_1: pad.3@322.84,506 R110.1
_HALL_2: pad.3@322.84,558 R111.1
_HALL_3: pad.3@322.84,454 R112.1
_I1: pad.3@1660.84,95 R102.1
_I2: pad.3@1442.84,69 R104.1
_LED_F_W: IC101.55 R1_LED14.2 | length 707.7
  Top Layer w10: R1_LED14.2 1009.52,1017 1053.52,1061 1408.84,1061 1535.58,934.26 IC101.55
_LED_FRK_B: IC101.59 R1_LED10.2 | length 1433.3
  Top Layer w10: R1_LED10.2 274.84,916 1027.52,916 1093.78,982.26 1376.23,982.26 1456.84,901.64 IC101.59
_LED_FRK_G: IC101.58 R1_LED11.2 | length 1253.2
  Top Layer w10: R1_LED11.2 451.84,940 1016.52,940 1078.46,1001.94 1384.38,1001.94 1476.53,909.8 IC101.58
_LED_FRK_R: IC101.57 R1_LED12.2 | length 1074.7
  Top Layer w10: R1_LED12.2 630.84,962 1009.52,962 1069.15,1021.63 1392.53,1021.63 1496.21,917.95 IC101.57
_LED_MBEAM_B: IC101.38 R1_LED7.2 | length 430.6
  Top Layer w10: IC101.38 2153.11,587.27 R1_LED7.2
_LED_MBEAM_G: IC101.39 R1_LED8.2 | length 563.2
  Top Layer w10: IC101.39 2069.95,606.95 2113.42,650.42 2113.42,688.58 2153.84,729 R1_LED8.2
_LED_MBEAM_R: IC101.40 R1_LED9.2 | length 714.9
  Top Layer w10: IC101.40 2019.48,626.64 2115.84,723 2115.84,952 R1_LED9.2
_LED_R_R: IC101.56 R1_LED13.2 | length 896.7
  Top Layer w10: R1_LED13.2 809.84,983 1002.52,983 1060.83,1041.32 1400.69,1041.32 1515.9,926.11 IC101.56
_LED_RDBEAM_B: IC101.16 R1_LED2.2 | length 1075
  Top Layer w10: R1_LED2.2 497.84,234 888,234 920,266 1206.52,266 1261.52,321 1261.52,476.52 1273.84,488.84 IC101.16
_LED_RDBEAM_G: IC101.17 R1_LED3.2 | length 859.4
  Top Layer w10: R1_LED3.2 676.84,212 900,212 936,248 1219.52,248 1279.52,308 1279.52,368.68 1329.8,418.96 IC101.17
_LED_RDBEAM_R: IC101.14 R1_LED4.2 | length 1495.2
  Top Layer w10: R1_LED4.2 140.84,279 872,279 897,304 1178.52,304 1221.84,347.32 1221.84,506 1244.06,528.21 IC101.14
_LED_RUBEAM_B: IC101.15 R1_LED5.2 | length 1288.4
  Top Layer w10: R1_LED5.2 320.84,258 882,258 910,286 1193.52,286 1241.84,334.32 1241.84,497 1253.37,508.53 IC101.15
_LED_RUBEAM_G: IC101.27 R1_LED6.2 | length 800.6
  Top Layer w10: IC101.27 1555.27,266.57 1592.84,229 2126,229 2154.84,200.16 R1_LED6.2
_LED_RUBEAM_R: IC101.37 R1_LED1.2 | length 579.5
  Top Layer w10: IC101.37 2100.26,567.58 2121.84,546 2121.84,419 R1_LED1.2
_PAS: pad.3@2253.84,109 R107.1 | length 30
  Top Layer w20: R107.1@2223.87,109.46 2223.95,109.46 2224.02,109.46 R107.1@2224.1,109.46 ; R107.1@2224.16,109.46 pad.3@2253.84,109
_PAS_OUT: IC101.8 R3_OK4.2 | length 1208.3
  Top Layer w10: R3_OK4.2 177.84,702 190.84,702 298.84,594 450.52,594 486.52,558 1081.52,558 1169.84,646.32 IC101.8
_PWMH_1: pad.3@2075.84,871 R118.1 | length 45
  Top Layer w20: R118.1 pad.3@2075.84,871
_PWMH_2: pad.3@2027.84,871 R119.1 | length 45
  Top Layer w20: R119.1 pad.3@2027.84,871
_PWMH_3: pad.3@1979.84,871 R120.1 | length 45
  Top Layer w20: R120.1 pad.3@1979.84,871
_PWML_1: pad.3@1968.84,381 R114.1 | length 40.4
  Top Layer w20: R114.1@1967.84,421 R114.1 1967.84,382 pad.3@1968.84,381
_PWML_2: pad.3@2020.84,381 R115.1 | length 62.8
  Top Layer w20: R115.1@2018.84,443 R115.1 2018.84,383 pad.3@2020.84,381
_PWML_3: pad.3@2072.84,381 R116.1 | length 78
  Top Layer w20: pad.3@2072.84,381 R116.1
_REV: IC101.2 R3_OK1.2 | length 494
  Top Layer w10: R3_OK1.2 832.84,701 896.28,764.43 IC101.2
_SPEED_SENS: IC101.3 R3_OK3.2 | length 731.6
  Top Layer w10: R3_OK3.2 640.84,665 837.84,665 917.59,744.75 IC101.3
BRAKE: J2_OK5.1 Q2_OK5.3 | length 86
  Top Layer w20: Q2_OK5.3@1914.84,384 J2_OK5.1
CAN_H: D100.2 IC103.7 pad.3@888.52,803 | length 194.9
  Top Layer w10: D100.2 947.26,807.74 973.52,834 973.52,856.68 985.84,869 IC103.7
CAN_L: D100.3 IC103.6 pad.3@888.52,862 | length 161.2
  Top Layer w10: D100.3 943.04,894.59 IC103.6
CAN_RX: IC101.61 IC103.4 | length 334.4
  Top Layer w10: IC103.4 1179.02,920.18 1219.84,961 1360.84,961 1417.47,904.37 IC101.61
CAN_TX: IC101.62 IC103.1 | length 359.7
  Top Layer w10: IC103.1 1206.25,843.41 1212.52,849.68 1212.52,913.68 1237.84,939 1352.84,939 1397.79,894.06 IC101.62
CRUISE: J2_OK2.1 Q2_OK2.3 | length 41.4
  Top Layer w20: J2_OK2.1 240.84,780.29 Q2_OK2.3
DAC1: C118.1 IC101.21 U100.3 | length 447.8
  Top Layer w10: C118.1 1376.52,212 1437.16,272.64 IC101.21
  Top Layer w15: U100.3@1198.33,154 1329.52,154 1364.52,189 C118.1
DAC2: C120.1 IC101.20 U100.5 | length 615.2
  Top Layer w10: U100.5@1009.35,204 1064.52,204 1089.52,179 1315.52,179 1325.52,189 1325.52,232 1351.52,258 C120.1 ; C120.1@1364.52,262 1386.52,262 1417.47,292.95 IC101.20
DM: pad.3@1925.84,874 R125.1 | length 45
  Top Layer w20: R125.1 pad.3@1925.84,872
DP: pad.3@1874.84,874 R126.1 | length 47
  Top Layer w20: R126.1 pad.3@1874.84,874
GND: C100.2 C101.2 C102.2 C103.2 C104.2 C105.2 C106.2 C107.2 C108.2 C109.2 C110.2 C111.2 C113.2 C115.2 C116.2 C117.2 C118.2 C119.2 C120.2 C121.2 C123.2 D100.1 IC100.2 IC101.18 IC101.60 IC101.63 IC103.2 NT100.1 Q1_LED1.2 Q1_LED2.2 Q1_LED3.2 Q1_LED4.2 Q1_LED5.2 Q1_LED6.2 Q1_LED7.2 Q1_LED8.2 Q1_LED9.2 Q1_LED10.2 Q1_LED11.2 Q1_LED12.2 Q1_LED13.2 Q1_LED14.2 Q2_OK1.2 Q2_OK2.2 Q2_OK3.2 Q2_OK4.2 Q2_OK5.2 R2_LED1.1 R2_LED2.1 R2_LED3.1 R2_LED4.1 R2_LED5.1 R2_LED6.1 R2_LED7.1 R2_LED8.1 R2_LED9.1 R2_LED10.1 R2_LED11.1 R2_LED12.1 R2_LED13.1 R2_LED14.1 R4_OK1.1 R4_OK2.1 R4_OK3.1 R4_OK4.1 R4_OK5.1 R101.2 R103.2 R105.2 R108.2 R113.1 R121.1 U100.4 U101.4 Z100.2 | length 945
  Top Layer w10: 750,469 755.2,474.2 903.96,474.2 ; C121.2 888.34,170.34 945,227 1076,227 ; IC103.2 1150.84,869 1137.84,856 1137.84,824 1146.84,815 1216.52,815 1230.52,829 1230.52,861 1264.84,895.32 C103.2 1353.84,912 1378.1,887.74 IC101.63 ; C111.2@1312.84,345 1342.84,375 1369.84,375 1378.1,383.26 IC101.18
  Top Layer w20: IC100.2 833.84,470
  other v1: 2004,47 1267,227 1746,348 688,376 1021,813 805,841 2074,1116 1053,1123
HALL_1_F: IC101.10 R110.2 | length 898.3
  Top Layer w10: R110.2 441.34,506.5 450.84,516 1102.52,516 1193.47,606.95 IC101.10
HALL_2_F: IC101.9 R111.2 | length 900.9
  Top Layer w10: R111.2 450.84,539 1095.52,539 1183.16,626.64 IC101.9
HALL_3_F: IC101.11 R112.2 | length 911.5
  Top Layer w10: R112.2 454.84,455 495.84,496 1111.52,496 1202.79,587.27 IC101.11
I1_SNS: C110.1 IC101.23 R102.2 R103.1 | length 635
  Top Layer w10: IC101.23 1476.53,193.32 1531.84,138 1670,138 1734.84,73.16 R102.2
  Top Layer w20: R102.2 1739.84,55 R103.1 C110.1
I2_SNS: C113.1 IC101.22 R104.2 R105.1 | length 432.3
  Top Layer w10: IC101.22 1456.84,178 1516.84,118 R104.2
  Top Layer w20: R104.2 1522.84,108 C113.1 R105.1
LED: IC101.54 R109.1 | length 168
  Top Layer w10: R109.1 1555.27,993.73 IC101.54
LED_CRSTL: pad.2@1435,1100 R109.2 | length 56
  Top Layer w20: pad.2@1435,1100 1449,1100 R109.2
LED_F_W: J1_LED14.1 Q1_LED14.3 | length 41.4
  Top Layer w20: J1_LED14.1 838.55,1069.71 Q1_LED14.3
LED_FRK_B: J1_LED10.1 Q1_LED10.3 | length 41.4
  Top Layer w20: J1_LED10.1 33.55,1069.71 Q1_LED10.3
LED_FRK_G: J1_LED11.1 Q1_LED11.3 | length 41.4
  Top Layer w20: J1_LED11.1@228.84,1064 J1_LED11.1 Q1_LED11.3
LED_FRK_R: J1_LED12.1 Q1_LED12.3 | length 40.4
  Top Layer w20: J1_LED12.1 429.84,1094.09 Q1_LED12.3
LED_MBEAM_B: J1_LED7.1 Q1_LED7.3 | length 41.4
  Top Layer w20: J1_LED7.1 2206.55,728.29 Q1_LED7.3
LED_MBEAM_G: J1_LED8.1 Q1_LED8.3 | length 41.4
  Top Layer w20: J1_LED8.1 2206.55,929.29 Q1_LED8.3
LED_MBEAM_R: J1_LED9.1 Q1_LED9.3 | length 41.4
  Top Layer w20: J1_LED9.1 2206.55,1130.29 Q1_LED9.3
LED_R_R: J1_LED13.1 Q1_LED13.3 | length 41.4
  Top Layer w20: J1_LED13.1 636.55,1068.71 Q1_LED13.3
LED_RDBEAM_B: J1_LED2.1 Q1_LED2.3 | length 41.4
  Top Layer w20: Q1_LED2.3 576.13,119.29 J1_LED2.1@581.84,125
LED_RDBEAM_G: J1_LED3.1 Q1_LED3.3 | length 41.4
  Top Layer w20: Q1_LED3.3 777.13,119.29 J1_LED3.1@782.84,125
LED_RDBEAM_R: J1_LED4.1 Q1_LED4.3 | length 41.4
  Top Layer w20: Q1_LED4.3 174.13,119.29 J1_LED4.1
LED_RUBEAM_B: J1_LED5.1 Q1_LED5.3 | length 41.4
  Top Layer w20: Q1_LED5.3 375.13,119.29 J1_LED5.1
LED_RUBEAM_G: J1_LED6.1 Q1_LED6.3 | length 41.4
  Top Layer w20: J1_LED6.1@2201.44,328.29 2207.15,322.58 Q1_LED6.3
LED_RUBEAM_R: J1_LED1.1 Q1_LED1.3 | length 41.4
  Top Layer w20: J1_LED1.1 2206.55,527.29 Q1_LED1.3
NetC104_1: C104.1 IC101.7 | length 395.8
  Top Layer w10: C104.1 941.84,603 964.84,580 1063.84,580 1149.85,666.01 IC101.7
NetC105_1: C105.1 IC101.31 | length 81.2
  Top Layer w10: IC101.31 1634.01,353.83 C105.1@1645.34,342.5
NetC106_1: C106.1 IC101.47 | length 111.7
  Top Layer w10: IC101.47 1779.28,764.43 C106.1
NetC108_1: C108.1 IC100.4 | length 46.9
  Top Layer w20: C108.1 795.68,349 IC100.4
NetC119_1: C119.1 R117.2 U100.1 | length 232.9
  Top Layer w20: U100.1@1198.33,54 1259.84,54 R117.2 1273.84,55 1298.84,80 1353.84,80 1368.84,95 C119.1
NetC121_1: C121.1 R122.2 U100.7 | length 128.9
  Top Layer w20: C121.1 R122.2 955.84,104 U100.7@1009.35,104
NetIC101_5: IC101.5 Z100.1 | length 281.3
  Top Layer w10: Z100.1 1119.52,699 1125.9,705.38 IC101.5
NetIC101_6: IC101.6 Z100.3 | length 312.3
  Top Layer w10: Z100.3 1056.35,604.51 1137.54,685.69 IC101.6
NetIC101_44: IC101.44 R125.2 | length 224.2
  Top Layer w10: IC101.44 1892.22,705.38 1925.84,739 R125.2
NetIC101_45: IC101.45 R126.2 | length 160.4
  Top Layer w10: IC101.45 1852.91,725.06 R126.2
NetQ1_LED1_1: Q1_LED1.1 R1_LED1.1 R2_LED1.2 | length 111.8
  Top Layer w20: R1_LED1.1 2182.84,467 2202.44,447.4 Q1_LED1.1 2200.84,437.11 R2_LED1.2
NetQ1_LED2_1: Q1_LED2.1 R1_LED2.1 R2_LED2.2 | length 111.8
  Top Layer w20: R2_LED2.2 485.95,125 Q1_LED2.1 496.24,123.4 515.84,143 R1_LED2.1
NetQ1_LED3_1: Q1_LED3.1 R1_LED3.1 R2_LED3.2 | length 111.8
  Top Layer w20: R2_LED3.2 686.95,125 Q1_LED3.1 697.24,123.4 716.84,143 R1_LED3.1
NetQ1_LED4_1: Q1_LED4.1 R1_LED4.1 R2_LED4.2 | length 111.8
  Top Layer w20: R2_LED4.2 83.95,125 Q1_LED4.1 94.24,123.4 113.84,143 R1_LED4.1
NetQ1_LED5_1: Q1_LED5.1 R1_LED5.1 R2_LED5.2 | length 111.8
  Top Layer w20: R2_LED5.2 284.95,125 Q1_LED5.1 295.24,123.4 314.84,143 R1_LED5.1
NetQ1_LED6_1: Q1_LED6.1 R1_LED6.1 R2_LED6.2 | length 110.7
  Top Layer w20: R1_LED6.1 2178.04,259 Q1_LED6.1 2197.84,228.8 R2_LED6.2
NetQ1_LED7_1: Q1_LED7.1 R1_LED7.1 R2_LED7.2 | length 111.8
  Top Layer w20: R1_LED7.1 2182.84,668 2202.44,648.4 Q1_LED7.1 2200.84,638.11 R2_LED7.2
NetQ1_LED8_1: Q1_LED8.1 R1_LED8.1 R2_LED8.2 | length 111.8
  Top Layer w20: R1_LED8.1 2182.84,869 2202.44,849.4 Q1_LED8.1 2200.84,839.11 R2_LED8.2
NetQ1_LED9_1: Q1_LED9.1 R1_LED9.1 R2_LED9.2 | length 111.8
  Top Layer w20: R1_LED9.1 2182.84,1070 2202.44,1050.4 Q1_LED9.1 2200.84,1040.11 R2_LED9.2
NetQ1_LED10_1: Q1_LED10.1 R1_LED10.1 R2_LED10.2 | length 111.8
  Top Layer w20: R1_LED10.1 93.84,1046 113.44,1065.6 Q1_LED10.1 123.73,1064 R2_LED10.2
NetQ1_LED11_1: Q1_LED11.1 R1_LED11.1 R2_LED11.2 | length 111.8
  Top Layer w20: R1_LED11.1 294.84,1046 314.44,1065.6 Q1_LED11.1 324.73,1064 R2_LED11.2
NetQ1_LED12_1: Q1_LED12.1 R1_LED12.1 R2_LED12.2 | length 114.6
  Top Layer w20: R1_LED12.1 495.84,1053 506.84,1064 Q1_LED12.1 R2_LED12.2
NetQ1_LED13_1: Q1_LED13.1 R1_LED13.1 R2_LED13.2 | length 111.8
  Top Layer w20: R1_LED13.1 696.84,1045 716.44,1064.6 Q1_LED13.1 726.73,1063 R2_LED13.2
NetQ1_LED14_1: Q1_LED14.1 R1_LED14.1 R2_LED14.2 | length 111.8
  Top Layer w20: R1_LED14.1 898.84,1046 918.44,1065.6 Q1_LED14.1 928.73,1064 R2_LED14.2
NetQ2_OK1_1: Q2_OK1.1 R3_OK1.1 R4_OK1.2 | length 125.1
  Top Layer w20: R3_OK1.1 740.84,738 756.44,753.6 Q2_OK1.1 771.73,752 R4_OK1.2
NetQ2_OK2_1: Q2_OK2.1 R3_OK2.1 R4_OK2.2 | length 125.1
  Top Layer w20: R3_OK2.1 310.84,738 326.44,753.6 Q2_OK2.1 341.73,752 R4_OK2.2
NetQ2_OK3_1: Q2_OK3.1 R3_OK3.1 R4_OK3.2 | length 125.1
  Top Layer w20: R3_OK3.1 524.84,738 540.44,753.6 Q2_OK3.1 555.73,752 R4_OK3.2
NetQ2_OK4_1: Q2_OK4.1 R3_OK4.1 R4_OK4.2 | length 125.1
  Top Layer w20: R3_OK4.1 96.84,738 112.44,753.6 Q2_OK4.1 127.73,752 R4_OK4.2
NetQ2_OK5_1: Q2_OK5.1 R3_OK5.1 R4_OK5.2 | length 117.1
  Top Layer w20: R4_OK5.2 1828.95,423 Q2_OK5.1 1830.55,429.55 1859.84,458.84 R3_OK5.1
NetR113_2: R113.2 R117.1 U100.2 | length 129.6
  Top Layer w20: U100.2@1198.33,104 1257.84,104 R117.1 R113.2
NetR121_2: R121.2 R122.1 U100.6 | length 231.8
  Top Layer w20: R121.2 839.84,110 855.84,126 914.84,126 936.84,148 R122.1 947.84,154 U100.6@1009.35,154
PAS_IN: C116.1 IC101.25 R107.2 R108.1 | length 870.5
  Top Layer w10: IC101.25 1515.9,227.94 1559.84,184 1850,184 1875,159 2045.84,159 2057.84,147 C116.1@2057.84,115
  Top Layer w20: C116.1@2057.84,115 R108.1@2095.84,115 ; R108.1@2104.84,117 R107.2@2138.84,117
PAS_OUT: J2_OK4.1 Q2_OK4.3 | length 41.4
  Top Layer w20: J2_OK4.1 26.84,780.29 Q2_OK4.3
PIN1: IC101.28 pad.3@1575.27,311 | length 108.1
  Top Layer w10: IC101.28 1574.95,311.32 pad.3@1575.27,311
PWMH_1_F: IC101.41 R118.2 | length 404.1
  Top Layer w10: IC101.41 1994.17,646.32 2075.84,728 R118.2
PWMH_2_F: IC101.42 R119.2 | length 346.8
  Top Layer w10: IC101.42 1963.85,666.01 2027.84,730 R119.2
PWMH_3_F: IC101.43 R120.2 | length 288.9
  Top Layer w10: IC101.43 1932.54,685.69 1979.84,733 R120.2
PWML_1_F: IC101.34 R114.2 | length 247.4
  Top Layer w10: IC101.34 1960.31,508.53 R114.2@1967.84,501
PWML_2_F: IC101.35 R115.2 | length 297.4
  Top Layer w10: IC101.35 2013.63,528.21 R115.2@2018.84,523
PWML_3_F: IC101.36 R116.2 | length 353
  Top Layer w10: IC101.36 2063.94,547.9 R116.2
REV: J2_OK1.1 Q2_OK1.3 | length 41.4
  Top Layer w20: J2_OK1.1 670.84,780.29 Q2_OK1.3
SPEED_SENS: J2_OK3.1 Q2_OK3.3 | length 41.4
  Top Layer w20: J2_OK3.1 454.84,780.29 Q2_OK3.3
SPI_CLK: IC101.51 U101.6 | length 296.3
  Top Layer w10: IC101.51 1614.32,1055.32 1632,1073 1696.35,1073 U101.6@1700.35,1069
SPI_MISO: IC101.52 U101.2 | length 555.9
  Top Layer w10: IC101.52 1594.64,1068.64 1626,1100 1755,1100 1836,1019 U101.2@1889.33,1019
SPI_MOSI: IC101.53 U101.5 | length 372.7
  Top Layer w10: IC101.53 1574.95,1078.95 1622,1126 1693.35,1126 U101.5@1700.35,1119
SWCLK: IC101.49 pad.2@1720.84,895 | length 84.1
  Top Layer w10: IC101.49 1694.69,895 pad.2@1720.84,895
SWDIO: IC101.46 pad.3@1826.84,758 | length 96
  Top Layer w10: IC101.46 1796.59,744.75 pad.3@1812.84,761
TEMP_MTR: C115.1 IC101.26 pad.3@1897,191 R106.2 | length 634
  Top Layer w10: IC101.26 1535.58,244.26 1570.84,209 1893.84,209 1911.84,191 C115.1@1972.84,191
USART_RX: pad.3@2095.84,332 R124.2 | length 86.4
  Top Layer w10: R124.2 2094.84,331 pad.3@2095.84,332
USART_RX_F: IC101.30 R124.1 | length 482.2
  Top Layer w10: IC101.30 1614.32,281.52 1624.84,271 1703,271 1733,301 1899.84,301 R124.1
USART_TX: pad.3@1864,265 R123.2 | length 34.7
  Top Layer w10: R123.2 1855.84,266 pad.3@1856.84,265
  Top Layer w20: pad.3@1856.84,265 pad.3@1864,265
USART_TX_F: IC101.29 R123.1 | length 311.8
  Top Layer w10: IC101.29 1594.64,268.2 1610.84,252 R123.1@1749,252
V_SNS: C102.1 IC101.24 R100.2 R101.1 | length 756.9
  Top Layer w10: IC101.24 1496.21,210.63 1545.84,161 1847,161 1869,139 2003.84,139 C102.1
Vref: C112.1 C114.1 IC101.13 IC102.2 | length 402.1
  Top Layer w10: C114.1@1152.84,350.56 1175.4,350.56 1202.84,378 1202.84,518 1232.74,547.9 IC101.13
  Top Layer w20: IC102.2@1052.24,355.48 1056.72,351 1152.4,351 C114.1@1152.84,350.56
Vssa: C112.2 C114.2 IC101.12 IC102.3 NT100.2 | length 397.5
  Top Layer w10: IC102.3 1015.84,446 1061,446 1076.44,430.56 C112.2 C114.2 1167.44,430.56 1169,429 1184.84,444.84 1184.84,531 1221.43,567.58 IC101.12 ; IC102.3@1014.84,448 IC102.3@1020.84,454
pads on no net: IC103.5 IC103.8

## Polygon pours and split planes (outlines as drawn)
GND on Bottom Layer "GND_L02_P002" (solid, remove dead copper, pour order 2): -2,-1 -2,1180.1 2301.15,1180.1 2301.15,-1
GND on Top Layer "GND_L01_P000" (solid, remove dead copper, pour order 0): 0,0 0,1181.1 2303.15,1181.1 2303.15,0

## Silkscreen, mask and mechanical layers (free items; w line width, h text height)
Top Overlay:
  the board outline again, w10